# Altium PCB 388D_Control_v1_PCB1_jiin.PcbDoc (part 1 of 3)
Units mil, origin at the board's own origin, x right, y up, seen from the top; angles counter-clockwise.
Board outline 4500 x 3200 mil, 6 copper layers (Top Layer, Singal Layer 2, Signal layer 3, Signal Layer 4, Signal Layer 5, Bottom Layer), stack 32.7 mil thick; 386 components, 377 nets, 1672 pads, 15 vias.
Unrouted connection lines stored in the file: 1151.
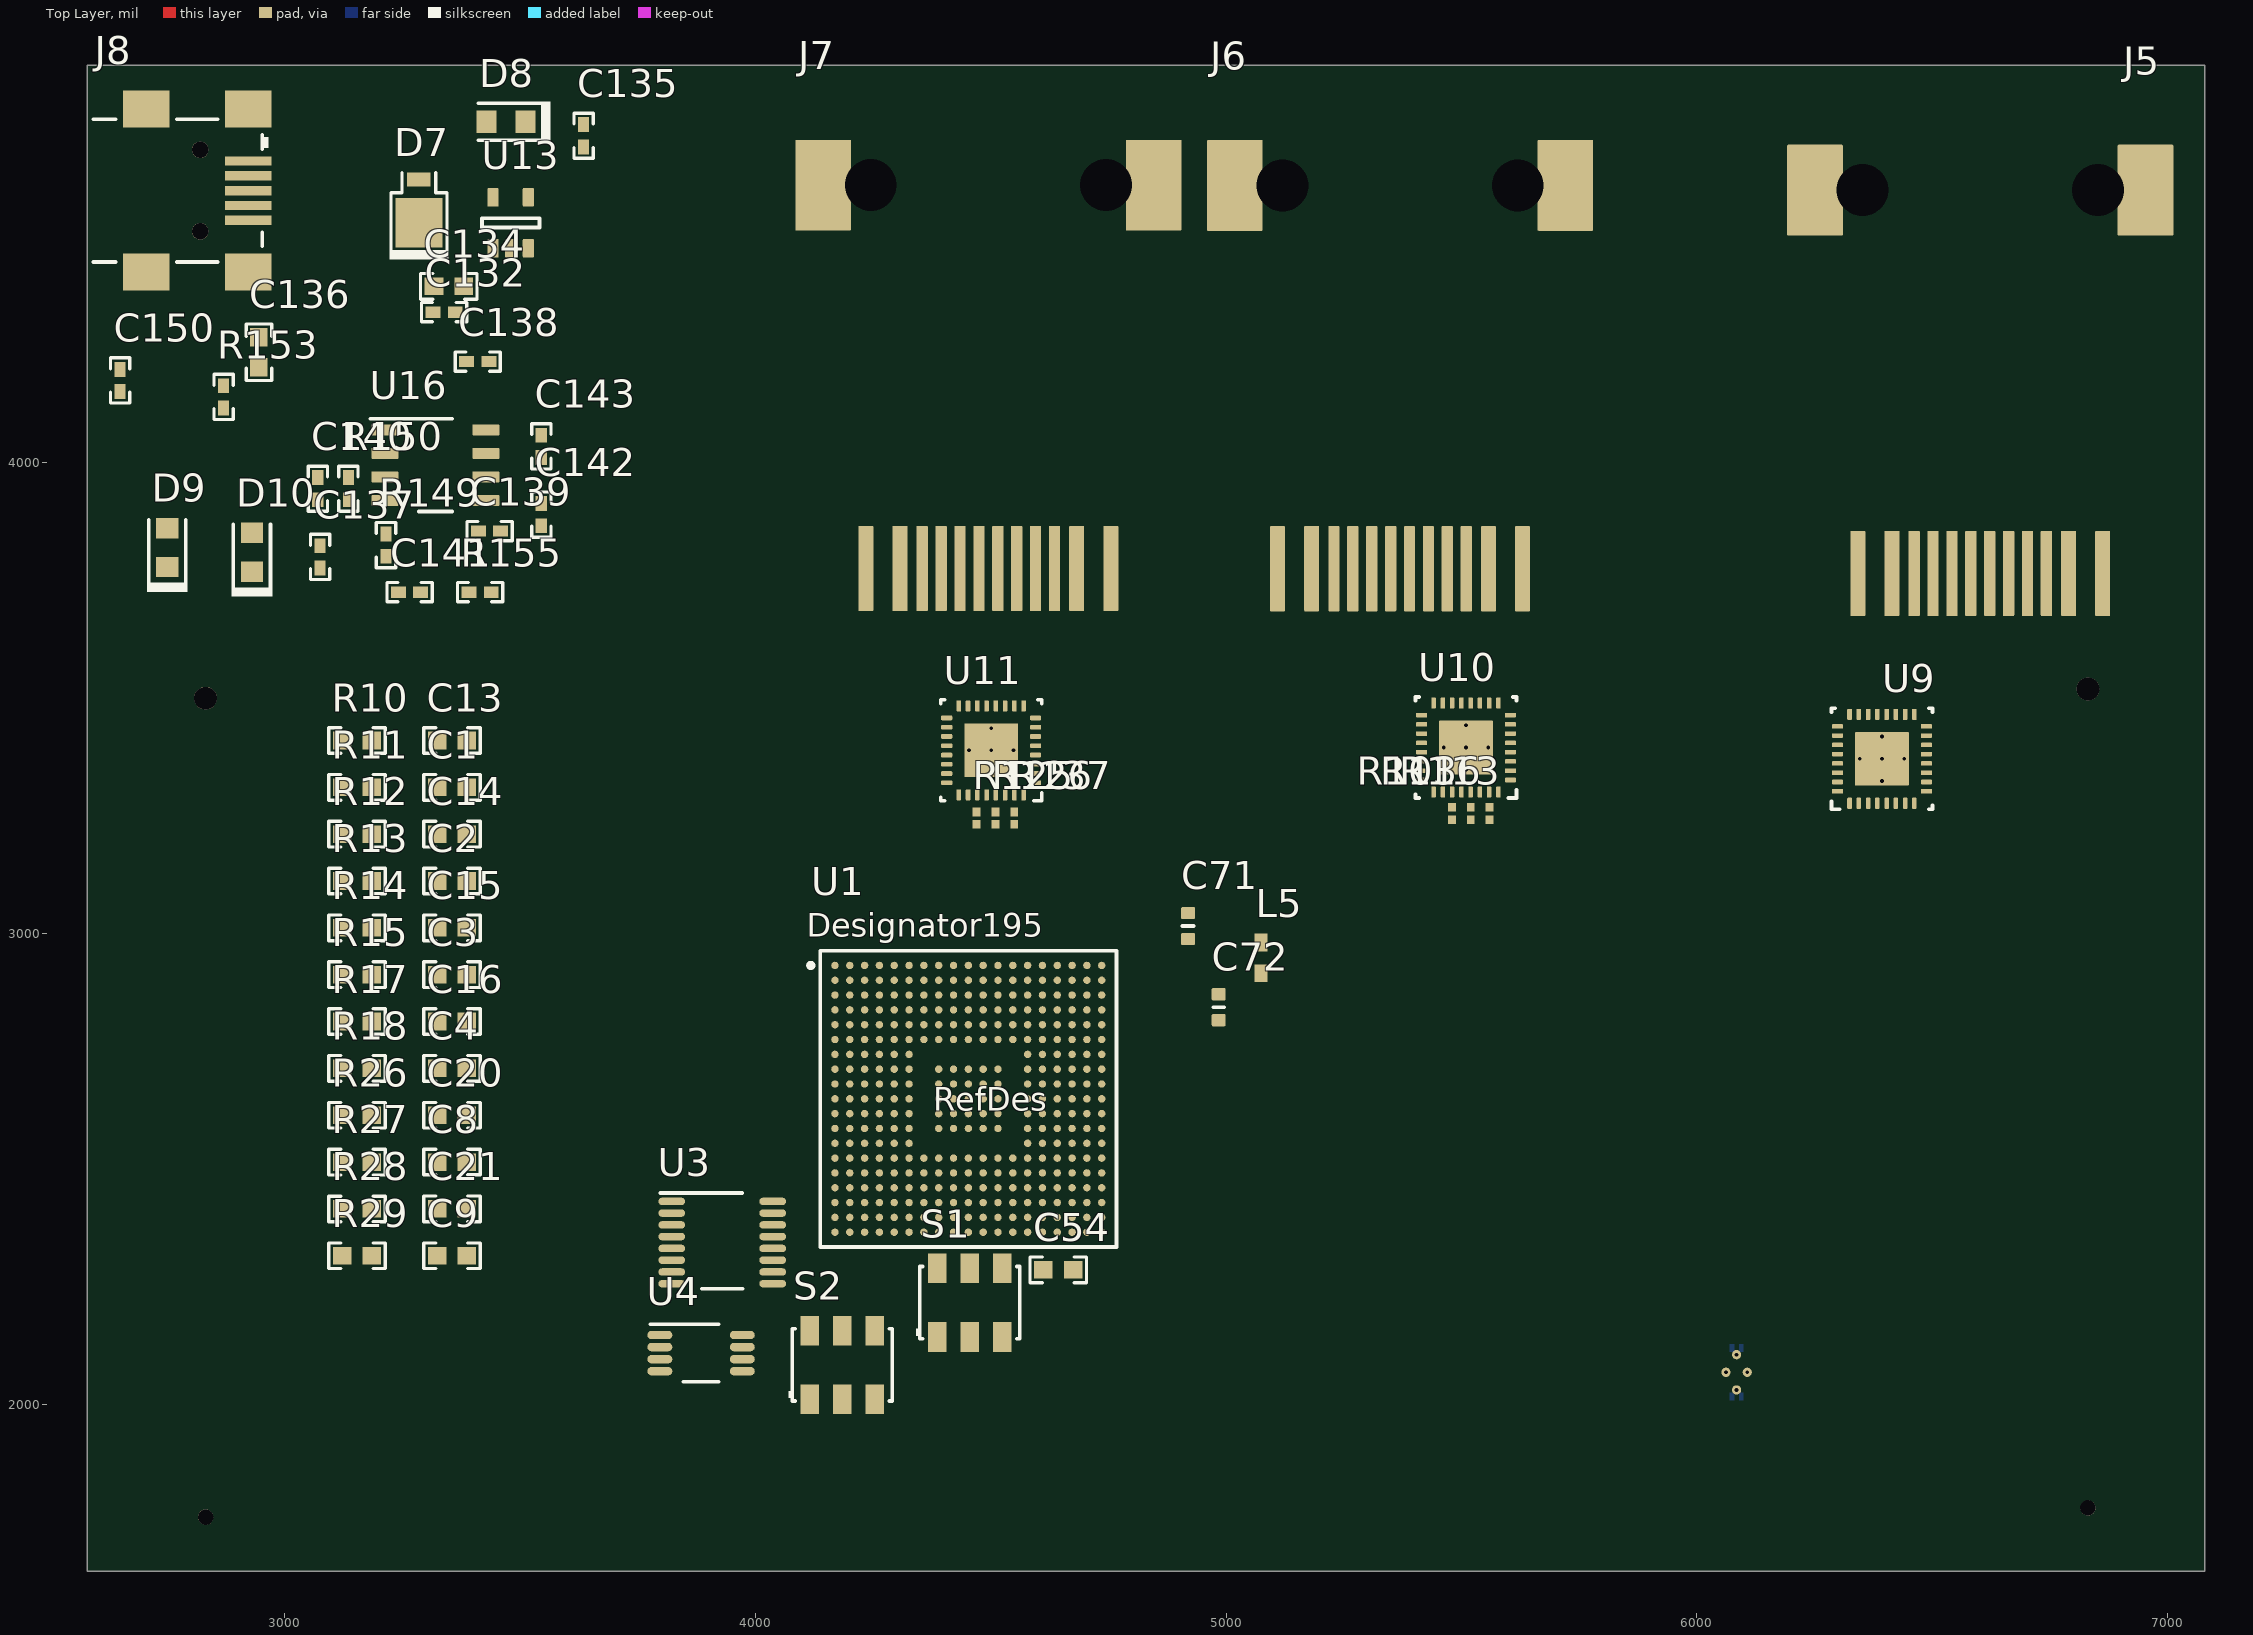
[diagram p0: Top Layer view]
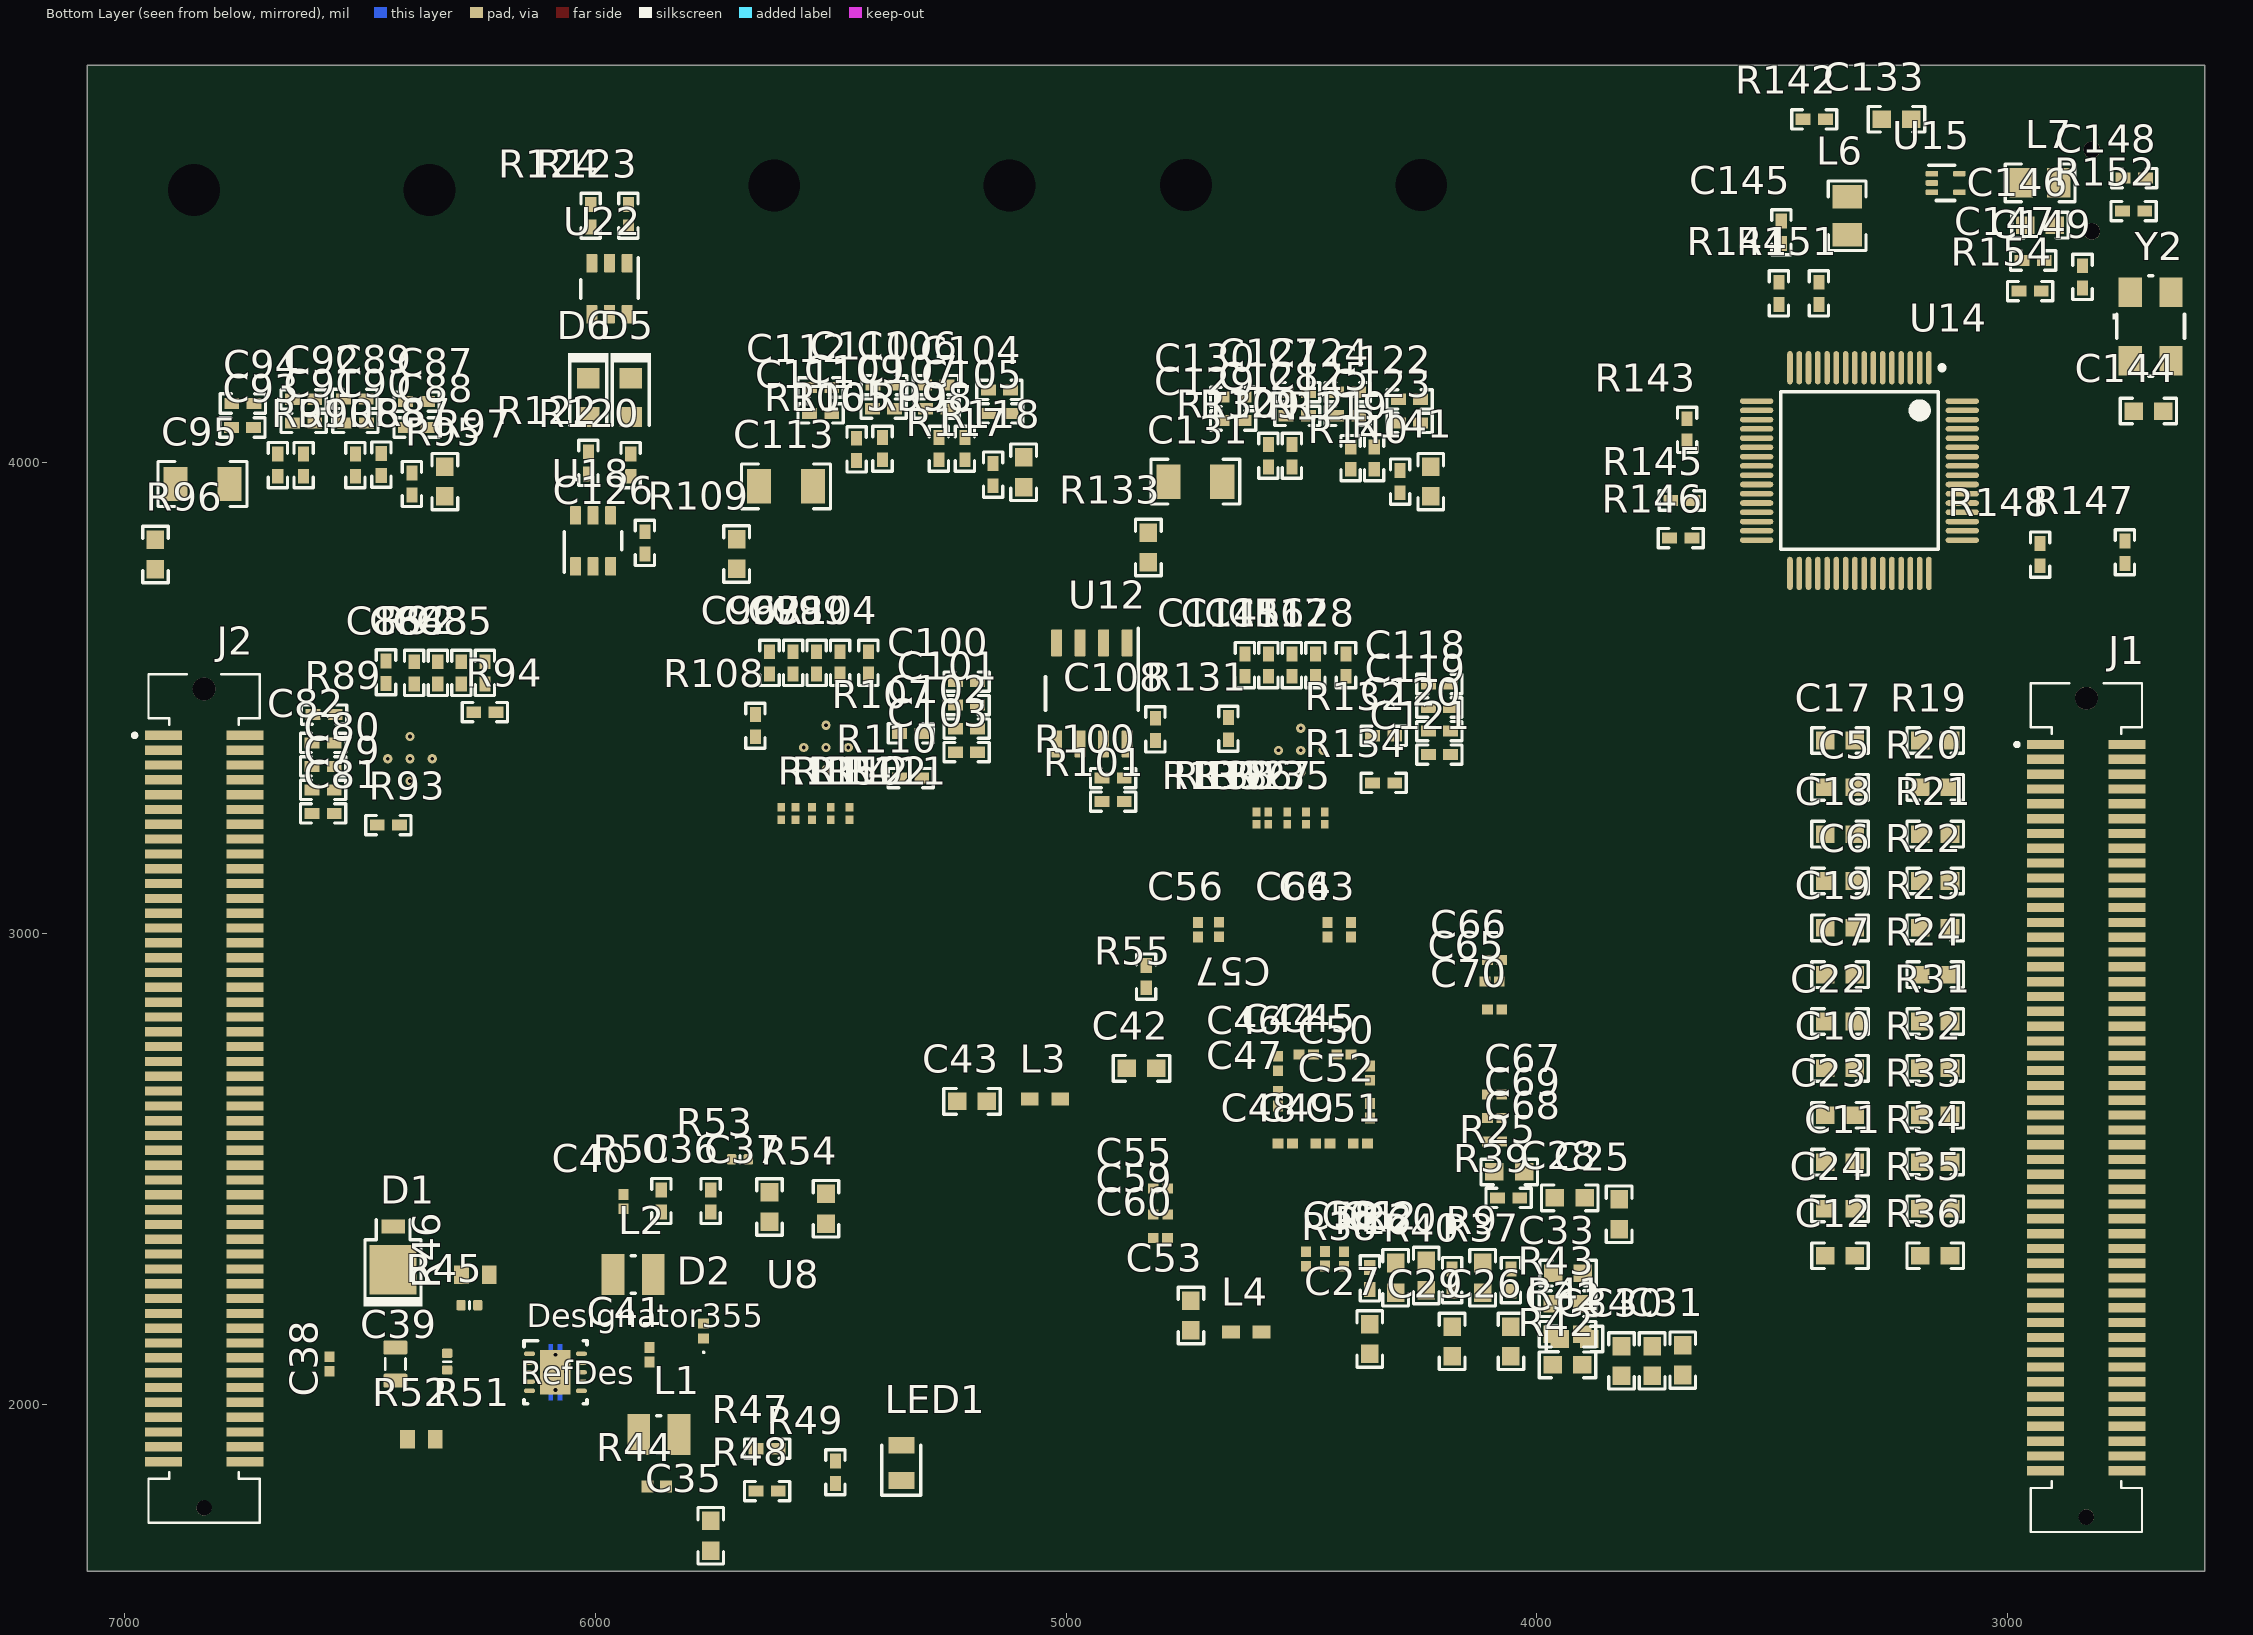
[diagram p1: Bottom Layer view, seen from below]

## Layer stack, top to bottom
Top Solder: solder mask 0.8, Solder Resist, Dk 3.5
Top Layer: signal copper 1.45
Dielectric 1: prepreg 5, FR-4, Dk 4.1
Singal Layer 2: signal copper 1.2
Dielectric 2: core 5, FR-4, Dk 4.1
Signal layer 3: signal copper 1.2
Dielectric 3: prepreg 5, FR-4, Dk 4.8
Signal Layer 4: signal copper 1.2
Dielectric 4: core 5, FR-4, Dk 4.1
Signal Layer 5: signal copper 1.2
Dielectric 5: prepreg 5, FR-4, Dk 4.1
Bottom Layer: signal copper 1.45
Bottom Solder: solder mask 0.8, Solder Resist, Dk 3.5

## Board outline
2580,4845 2580,1645 7080,1645 7080,4845

## Design rules (kind name [scope] priority, off if disabled: settings)
Clearance [All] p1: gap=3.94 ignorepadtopadclearanceinfootprint=FALSE
DiffPairsRouting [All] p1: maxlimit=10 minlimit=10 mostfreqgap=10 toplayer_minwidth=15 toplayer_maxwidth=15 toplayer_prefwidth=15 midlayer1_minwidth=15 midlayer1_maxwidth=15 midlayer1_prefwidth=15 midlayer2_minwidth=15 midlayer2_maxwidth=15 midlayer2_prefwidth=15 midlayer3_minwidth=15 midlayer3_maxwidth=15 midlayer3_prefwidth=15 midlayer4_minwidth=15 midlayer4_maxwidth=15 midlayer4_prefwidth=15 bottomlayer_minwidth=15 bottomlayer_maxwidth=15 bottomlayer_prefwidth=15 maxuncoupledlength=500
PolygonConnect [All] p1: connectstyle=Relief reliefconductorwidth=10 reliefentries=4 polygonreliefangle="90 Angle" airgapwidth=10
RoutingVias [All] p1: holewidth=28 width=50 viastyle="Through Hole" minholewidth=28 minwidth=50 maxholewidth=28 maxwidth=50
SolderMaskExpansion [All] p1: expansion=4 istentingtop=FALSE
SupplyNets "Schematic Supply Nets_13" [InNet('EMU_GND')] p1: voltage=0.000
SupplyNets "Schematic Supply Nets_12" [InNet('EMU_5V0')] p2: voltage=0.000
SupplyNets "Schematic Supply Nets_11" [InNet('MCU_GPIO4')] p3: voltage=0.000
SupplyNets "Schematic Supply Nets_10" [InNet('EMU_3V3')] p4: voltage=0.000
SupplyNets "Schematic Supply Nets_9" [InNet('EMU_USB_5V0')] p5: voltage=0.000
SupplyNets "Schematic Supply Nets_8" [InNet('EMU_1V8')] p6: voltage=0.000
SupplyNets "Schematic Supply Nets_7" [InNet('3V3')] p7: voltage=0.000
SupplyNets "Schematic Supply Nets_5" [InNet('IN_5V0')] p8: voltage=0.000
SupplyNets "Schematic Supply Nets_4" [InNet('VDDA_3V3')] p9: voltage=0.000
SupplyNets "Schematic Supply Nets_3" [InNet('VDD_3V3')] p10: voltage=0.000
SupplyNets "Schematic Supply Nets_1" [InNet('1V2')] p11: voltage=0.000
SupplyNets "Schematic Supply Nets" [InNet('VDD_1V2')] p12: voltage=0.000
Width [All] p1: maxlimit=10 minlimit=10 preferedwidth=10
29 further rules are at their usual default settings.

## Classes and differential pairs
component class 8.Emulator_Interface: C151 C152 C153 C154 C155 C156 C157 C158 C159 C160 J9 J10 R156 S5 U17 U19 U20 U21 U218
component class 7.Emulator: C132 C133 C134 C135 C136 C137 C138 C139 C140 C141 C142 C143 C144 C145 C146 C147 C148 C149 C150 D7 D8 D9 D10 J8 L6 L7 R142 R143 R144 R145 R146 R147 R148 R149 R150 R151 R152 R153 R154 R155 TP11 TP12 TP13 U13 U14 U15 U16 Y2
component class 6.ETCAT: C96 C97 C98 C99 C100 C101 C102 C103 C104 C105 C106 C107 C108 C109 C110 C111 C112 C113 C114 C115 C116 C117 C118 C119 C120 C121 C122 C123 C124 C125 C126 C127 C128 C129 C130 C131 D5 D6 J6 J7 R98 R99 R100 R101 R102 R103 R104 R105 R106 R107 R108 R109 R110 R111 R112 R113 R114 R115 R116 R117 R118 R119 R120 R121 R122 R123 R124 R125 R126 R127 R128 R129 R130 R131 R132 R133 R134 R135 R136 R137 R138 R139 R140 R141 U10 U11 U12 U18 U22
component class 5.ETH: C79 C80 C81 C82 C83 C84 C85 C86 C87 C88 C89 C90 C91 C92 C93 C94 C95 J5 R87 R88 R89 R90 R91 R92 R93 R94 R95 R96 R97 U9
component class 3.ADC: C1 C2 C3 C4 C5 C6 C7 C8 C9 C10 C11 C12 C13 C14 C15 C16 C17 C18 C19 C20 C21 C22 C23 C24 C25 C26 C27 C28 C29 C30 C31 C32 C33 C34 R9 R10 R11 R12 R13 R14 R15 R16 R17 R18 R19 R20 R21 R22 R23 R24 R25 R26 R27 R28 R29 R30 R31 R32 R33 R34 R35 R36 R37 R38 R39 R40 R41 R42 R43 S1 S2 U1 U3 U4
component class 2.Support: C73 C74 C75 C76 C77 C78 D3 D4 J3 R56 R57 R58 R59 R60 R61 R62 R63 R64 R65 R66 R67 R68 R69 R70 R71 R72 R73 R74 R75 R76 R77 R78 R79 R80 R81 R82 R83 R84 R85 R86 S3 S4 TP5 TP6 TP7 TP8 TP9 TP10 U2 U5 U6 U7 Y1
component class 1.GPIO: J1 J2 R1 R2 R3 R4 R5 R6 R7 R8
component class 4.Power: C35 C36 C37 C38 C39 C40 C41 C42 C43 C44 C45 C46 C47 C48 C49 C50 C51 C52 C53 C54 C55 C56 C57 C58 C59 C60 C61 C62 C63 C64 C65 C66 C67 C68 C69 C70 C71 C72 D1 D2 L1 L2 L3 L4 L5 LED1 R44 R45 R46 R47 R48 R49 R50 R51 R52 R53 R54 R55 TP1 TP2 TP3 TP4 U8
differential pair TD: +TD_P -TD_N
differential pair RD: +RD_P -RD_N
differential pair P1_TD: +P1_TD_P -P1_TD_N
differential pair P1_RD: +P1_RD_P -P1_RD_N
differential pair P0_TD: +P0_TD_P -P0_TD_N
differential pair P0_RD: +P0_RD_P -P0_RD_N
differential pair D4D5: +D4D5_P -D4D5_N
differential pair D2D3: +D2D3_P -D2D3_N
differential pair D0D1: +D0D1_P -D0D1_N
differential pair C4C5: +C4C5_P -C4C5_N
differential pair C2C3: +C2C3_P -C2C3_N
differential pair B4B5: +B4B5_P -B4B5_N
differential pair B2B3: +B2B3_P -B2B3_N
differential pair B0B1: +B0B1_P -B0B1_N
differential pair ADC_IN1415: +ADC_IN1415_P -ADC_IN1415_N
differential pair ADC_D4D5: +ADC_D4D5_P -ADC_D4D5_N
differential pair ADC_D2D3: +ADC_D2D3_P -ADC_D2D3_N
differential pair ADC_D0D1: +ADC_D0D1_P -ADC_D0D1_N
differential pair ADC_C4C5: +ADC_C4C5_P -ADC_C4C5_N
differential pair ADC_C2C3: +ADC_C2C3_P -ADC_C2C3_N
differential pair ADC_B4B5: +ADC_B4B5_P -ADC_B4B5_N
differential pair ADC_B2B3: +ADC_B2B3_P -ADC_B2B3_N
differential pair ADC_B0B1: +ADC_B0B1_P -ADC_B0B1_N
differential pair ADC_A4A5: +ADC_A4A5_P -ADC_A4A5_N
differential pair ADC_A2A3: +ADC_A2A3_P -ADC_A2A3_N
differential pair ADC_A0A1: +ADC_A0A1_P -ADC_A0A1_N
differential pair A4A5: +A4A5_P -A4A5_N
differential pair A2A3: +A2A3_P -A2A3_N
differential pair A0A1: +A0A1_P -A0A1_N
differential pair 1415: +1415_P -1415_N

## Components (designator, comment, footprint, x,y, rotation, side; value= is the part's Value field where it differs from the comment)
C1 "C0603C331J5GACTU" 0603 3355,3310.45 r0 top value=330pF
C2 "C0603C331J5GACTU" 0603 3355,3111.36 r0 top value=330pF
C3 "C0603C331J5GACTU" 0603 3355,2912.27 r0 top value=330pF
C4 "C0603C331J5GACTU" 0603 3355,2713.18 r0 top value=330pF
C5 "C0603C331J5GACTU" 0603 3355,3310.45 r0 bottom value=330pF
C6 "C0603C331J5GACTU" 0603 3355,3111.36 r0 bottom value=330pF
C7 "C0603C331J5GACTU" 0603 3355,2912.27 r0 bottom value=330pF
C8 "C0603C331J5GACTU" 0603 3355,2514.09 r0 top value=330pF
C9 "C0603C331J5GACTU" 0603 3355,2315 r0 top value=330pF
C10 "C0603C331J5GACTU" 0603 3355,2713.18 r0 bottom value=330pF
C11 "C0603C331J5GACTU" 0603 3355,2514.09 r0 bottom value=330pF
C12 "C0603C331J5GACTU" 0603 3355,2315 r0 bottom value=330pF
C13 "C0603C331J5GACTU" 0603 3355,3410 r0 top value=330pF
C14 "C0603C331J5GACTU" 0603 3355,3210.91 r0 top value=330pF
C15 "C0603C331J5GACTU" 0603 3355,3011.82 r0 top value=330pF
C16 "C0603C331J5GACTU" 0603 3355,2812.73 r0 top value=330pF
C17 "C0603C331J5GACTU" 0603 3355,3410 r0 bottom value=330pF
C18 "C0603C331J5GACTU" 0603 3355,3210.91 r0 bottom value=330pF
C19 "C0603C331J5GACTU" 0603 3355,3011.82 r0 bottom value=330pF
C20 "C0603C331J5GACTU" 0603 3355,2613.64 r0 top value=330pF
C21 "C0603C331J5GACTU" 0603 3355,2414.55 r0 top value=330pF
C22 "C0603C331J5GACTU" 0603 3355,2812.73 r0 bottom value=330pF
C23 "C0603C331J5GACTU" 0603 3355,2613.64 r0 bottom value=330pF
C24 "C0603C331J5GACTU" 0603 3355,2414.55 r0 bottom value=330pF
C25 "C0603C104K8RACTU" 0603 3824.49,2403.15 r270 bottom value=0.1uF
C26 "GRM188R61A226ME15D" 0603 4054.49,2133.15 r270 bottom value=22uF
C27 "GRM188R61A226ME15D" 0603 4354.49,2138.15 r270 bottom value=22uF
C28 "GRM188R61A226ME15D" 0603 3929.49,2438.15 r180 bottom value=22uF
C29 "GRM188R61A226ME15D" 0603 4179.49,2133.15 r270 bottom value=22uF
C30 "C0603C104K8RACTU" 0603 3754.49,2091.65 r270 bottom value=0.1uF
C31 "C0603C225K9PACTU" 0603 3689.49,2093.15 r270 bottom value=2.2uF
C32 "C0603C105Z9VACTU" 0603 3919.49,2138.15 r180 bottom value=1uF
C33 "C0603C105Z9VACTU" 0603 3932.99,2278.15 r180 bottom value=1uF
C34 "C0603C105Z9VACTU" 0603 3819.49,2091.65 r90 bottom value=1uF
C35 "GRM188R61A226ME15D" 0603 5755,1720 r270 bottom value=22uF
C36 "885012005043" 0402 5755,2431.38 r90 bottom value=33pF
C37 "GRM188R61A226ME15D" 0603 5630,2418.5 r90 bottom value=22uF
C38 "Capacitor 0.1 uF +/- 5% 16 V 0402" CAPC1005X56X25LL10T15 6565,2085 r90 bottom value=0.1uF/C0402
C39 "Capacitor 22µF +/-40% 16V 0805" CAPC0805(2012)145_L 6425,2084.96 r90 bottom value=22μF/C0805
C40 "Capacitor 0.1 uF +/- 5% 16 V 0402" CAPC1005X56X25LL10T15 5940,2430 r270 bottom value=0.1uF/C0402
C41 "Capacitor 0.1 uF +/- 5% 16 V 0402" CAPC1005X56X25LL10T15 5885,2104.65 r270 bottom value=0.1uF/C0402
C42 "C0603C225K8PACTU" 0603 4839.49,2713.15 r0 bottom value=2.2uF
C43 "C0603C225K8PACTU" 0603 5199.49,2643.15 r0 bottom value=2.2uF
C44 "Capacitor 0.1 uF +/- 5% 16 V 0402" CAPC1005X56X25LL10T15 4489.49,2743.15 r180 bottom value=0.1uF/C0402
C45 "Capacitor 0.1 uF +/- 5% 16 V 0402" CAPC1005X56X25LL10T15 4409.49,2743.15 r0 bottom value=0.1uF/C0402
C46 "Capacitor 0.1 uF +/- 5% 16 V 0402" CAPC1005X56X25LL10T15 4549.49,2723.5 r90 bottom value=0.1uF/C0402
C47 "Capacitor 0.1 uF +/- 5% 16 V 0402" CAPC1005X56X25LL10T15 4549.49,2648.5 r90 bottom value=0.1uF/C0402
C48 "Capacitor 0.1 uF +/- 5% 16 V 0402" CAPC1005X56X25LL10T15 4534.13,2553.15 r0 bottom value=0.1uF/C0402
C49 "Capacitor 0.1 uF +/- 5% 16 V 0402" CAPC1005X56X25LL10T15 4454.13,2553.15 r180 bottom value=0.1uF/C0402
C50 "Capacitor 0.1 uF +/- 5% 16 V 0402" CAPC1005X56X25LL10T15 4354.49,2703.15 r270 bottom value=0.1uF/C0402
C51 "Capacitor 0.1 uF +/- 5% 16 V 0402" CAPC1005X56X25LL10T15 4374.49,2553.15 r180 bottom value=0.1uF/C0402
C52 "Capacitor 0.1 uF +/- 5% 16 V 0402" CAPC1005X56X25LL10T15 4354.49,2623.15 r270 bottom value=0.1uF/C0402
C53 "C0603C225K8PACTU" 0603 4734.49,2188.15 r90 bottom value=2.2uF
C54 "C0603C225K8PACTU" 0603 4643.5,2285 r180 top value=2.2uF
C55 "Capacitor 0.1 uF +/- 5% 16 V 0402" CAPC1005X56X25LL10T15 4799.13,2458.15 r180 bottom value=0.1uF/C0402
C56 "Capacitor 0.1 uF +/- 5% 16 V 0402" CAPC1005X56X25LL10T15 4674.49,3008.15 r270 bottom value=0.1uF/C0402
C57 "Capacitor 0.1 uF +/- 5% 16 V 0402" CAPC1005X56X25LL10T15 4719.49,3007.8 r270 bottom value=0.1uF/C0402
C58 "Capacitor 0.1 uF +/- 5% 16 V 0402" CAPC1005X56X25LL10T15 4489.49,2308.15 r90 bottom value=0.1uF/C0402
C59 "Capacitor 0.1 uF +/- 5% 16 V 0402" CAPC1005X56X25LL10T15 4799.13,2403.15 r180 bottom value=0.1uF/C0402
C60 "Capacitor 0.1 uF +/- 5% 16 V 0402" CAPC1005X56X25LL10T15 4799.49,2353.15 r180 bottom value=0.1uF/C0402
C61 "Capacitor 0.1 uF +/- 5% 16 V 0402" CAPC1005X56X25LL10T15 4449.49,2308.5 r90 bottom value=0.1uF/C0402
C62 "Capacitor 0.1 uF +/- 5% 16 V 0402" CAPC1005X56X25LL10T15 4409.49,2308.15 r90 bottom value=0.1uF/C0402
C63 "Capacitor 0.1 uF +/- 5% 16 V 0402" CAPC1005X56X25LL10T15 4394.49,3007.8 r270 bottom value=0.1uF/C0402
C64 "Capacitor 0.1 uF +/- 5% 16 V 0402" CAPC1005X56X25LL10T15 4444.49,3007.8 r270 bottom value=0.1uF/C0402
C65 "Capacitor 0.1 uF +/- 5% 16 V 0402" CAPC1005X56X25LL10T15 4094.49,2898.15 r0 bottom value=0.1uF/C0402
C66 "Capacitor 0.1 uF +/- 5% 16 V 0402" CAPC1005X56X25LL10T15 4089.13,2943.15 r0 bottom value=0.1uF/C0402
C67 "Capacitor 0.1 uF +/- 5% 16 V 0402" CAPC1005X56X25LL10T15 4089.13,2658.15 r0 bottom value=0.1uF/C0402
C68 "Capacitor 0.1 uF +/- 5% 16 V 0402" CAPC1005X56X25LL10T15 4089.13,2558.15 r0 bottom value=0.1uF/C0402
C69 "Capacitor 0.1 uF +/- 5% 16 V 0402" CAPC1005X56X25LL10T15 4089.13,2608.15 r0 bottom value=0.1uF/C0402
C70 "Capacitor 0.1 uF +/- 5% 16 V 0402" CAPC1005X56X25LL10T15 4089.13,2838.15 r0 bottom value=0.1uF/C0402
C71 "Capacitor 10µF +/-20% 10V 0603" CAPC0603(1608)100_L 4919.49,3015.59 r90 top value=10μF
C72 "Capacitor 10µF +/-20% 10V 0603" CAPC0603(1608)100_L 4984.49,2843.15 r90 top value=10μF
C73 "CL05B104KP5NNNC" 0402 15610,3060 r90 top value=0.1uF
C74 "C0402C103J5RACTU" 0402 14020,3060 r90 top value=0.01uF
C75 "CL05B104KP5NNNC" 0402 13575,3060 r90 top value=0.1uF
C76 "C0402C103J5RACTU" 0402 12455,3060 r90 top value=0.01uF
C77 "CL05B104KP5NNNC" 0402 11995,3060 r90 top value=0.1uF
C78 "CL05B104KP5NNNC" 0402 10210,3060 r90 top value=0.1uF
C79 "CL05A106MQ5NUNC" 0402 6578.62,3305 r0 bottom value=10uF
C80 "EMK105BJ105KVHF" 0402 6578.62,3355 r0 bottom value=1uF
C81 "LMK105BJ104KV-F" 0402 6578.62,3255 r0 bottom value=0.1uF
C82 "885012205031" 0402 6578.62,3405 r0 bottom value=0.01uF
C83 "885012205031" 0402 6285,3553.62 r90 bottom value=0.01uF
C84 "LMK105BJ104KV-F" 0402 6335,3553.62 r90 bottom value=0.1uF
C85 "EMK105BJ105KVHF" 0402 6235,3553.62 r90 bottom value=1uF
C86 "CL05A106MQ5NUNC" 0402 6385,3553.62 r90 bottom value=10uF
C87 "LMK105BJ104KV-F" 0402 6380,4130 r180 bottom value=0.1uF
C88 "EMK105BJ105KVHF" 0402 6380,4075 r180 bottom value=1uF
C89 "EMK105BJ105KVHF" 0402 6511.38,4136 r0 bottom value=1uF
C90 "LMK105BJ104KV-F" 0402 6510,4085 r0 bottom value=0.1uF
C91 "EMK105BJ105KVHF" 0402 6620,4085 r180 bottom value=1uF
C92 "LMK105BJ104KV-F" 0402 6620,4135 r180 bottom value=0.1uF
C93 "LMK105BJ104KV-F" 0402 6750,4075 r0 bottom value=0.1uF
C94 "EMK105BJ105KVHF" 0402 6749.12,4126 r0 bottom value=1uF
C95 "12061C472KAT2A" 1206 6835,3955 r180 bottom value=4700pF
C96 "CL05A106MQ5NUNC" 0402 5630,3575 r90 bottom value=10uF
C97 "EMK105BJ105KVHF" 0402 5580,3575 r90 bottom value=1uF
C98 "LMK105BJ104KV-F" 0402 5530,3575 r90 bottom value=0.1uF
C99 "885012205031" 0402 5480,3575 r90 bottom value=0.01uF
C100 "885012205031" 0402 5211.38,3535 r180 bottom value=0.01uF
C101 "LMK105BJ104KV-F" 0402 5211.38,3485 r180 bottom value=0.1uF
C102 "EMK105BJ105KVHF" 0402 5211.38,3435 r180 bottom value=1uF
C103 "CL05A106MQ5NUNC" 0402 5211.38,3385 r180 bottom value=10uF
C104 "LMK105BJ104KV-F" 0402 5141.38,4155 r180 bottom value=0.1uF
C105 "EMK105BJ105KVHF" 0402 5140,4105 r180 bottom value=1uF
C106 "EMK105BJ105KVHF" 0402 5276.38,4165 r0 bottom value=1uF
C107 "LMK105BJ104KV-F" 0402 5275,4115 r0 bottom value=0.1uF
C108 "CL05B104KP5NNNC" 0402 4810,3433.62 r90 bottom value=0.1uF
C109 "EMK105BJ105KVHF" 0402 5387.76,4115 r180 bottom value=1uF
C110 "LMK105BJ104KV-F" 0402 5386.38,4165 r180 bottom value=0.1uF
C111 "LMK105BJ104KV-F" 0402 5521.38,4105 r0 bottom value=0.1uF
C112 "EMK105BJ105KVHF" 0402 5521.38,4160 r0 bottom value=1uF
C113 "12061C472KAT2A" 1206 5595,3950 r180 bottom value=4700pF
C114 "CL05A106MQ5NUNC" 0402 4620,3570 r90 bottom value=10uF
C115 "EMK105BJ105KVHF" 0402 4570,3570 r90 bottom value=1uF
C116 "LMK105BJ104KV-F" 0402 4520,3570 r90 bottom value=0.1uF
C117 "885012205031" 0402 4470,3570 r90 bottom value=0.01uF
C118 "885012205031" 0402 4206.38,3530 r180 bottom value=0.01uF
C119 "LMK105BJ104KV-F" 0402 4206.38,3480 r180 bottom value=0.1uF
C120 "EMK105BJ105KVHF" 0402 4206.38,3430 r180 bottom value=1uF
C121 "CL05A106MQ5NUNC" 0402 4206.38,3380 r180 bottom value=10uF
C122 "LMK105BJ104KV-F" 0402 4270,4135 r180 bottom value=0.1uF
C123 "EMK105BJ105KVHF" 0402 4270,4085 r180 bottom value=1uF
C124 "EMK105BJ105KVHF" 0402 4401.38,4150 r0 bottom value=1uF
C125 "LMK105BJ104KV-F" 0402 4401.38,4100 r0 bottom value=0.1uF
C126 "CL05B104KP5NNNC" 0402 5895,3830 r270 bottom value=0.1uF
C127 "EMK105BJ105KVHF" 0402 4508.62,4150 r180 bottom value=1uF
C128 "LMK105BJ104KV-F" 0402 4508.62,4100 r180 bottom value=0.1uF
C129 "LMK105BJ104KV-F" 0402 4645,4090 r0 bottom value=0.1uF
C130 "EMK105BJ105KVHF" 0402 4645,4140 r0 bottom value=1uF
C131 "12061C472KAT2A" 1206 4725,3960 r180 bottom value=4700pF
C132 "CL05B104KP5NNNC" 0402 3338.62,4320 r0 top value=0.1uF
C133 "C0603C475K9PACTU" 0603 3235,4730 r180 bottom value=4.7uF
C134 "C0603C475K9PACTU" 0603 3348.5,4375 r180 top value=4.7uF
C135 "0402ZC103KAT2A" 0402 3635,4695 r270 top value=0.01uF
C136 "C0603C475K9PACTU" 0603 2945,4235 r90 top value=4.7uF
C137 "CL05B104KP5NNNC" 0402 3075,3800 r90 top value=0.1uF
C138 "CL05B104KP5NNNC" 0402 3410,4215 r180 top value=0.1uF
C139 "CL05B104KP5NNNC" 0402 3435,3855 r180 top value=0.1uF
C140 "CL05B104KP5NNNC" 0402 3070,3945 r90 top value=0.1uF
C141 "CL05B104KP5NNNC" 0402 3265,3725 r0 top value=0.1uF
C142 "CL05B104KP5NNNC" 0402 3545,3890 r270 top value=0.1uF
C143 "CL05B104KP5NNNC" 0402 3545,4035 r90 top value=0.1uF
C144 "C0603C475K9PACTU" 0603 2700,4110 r0 bottom value=4.7uF
C145 "CL05B104KP5NNNC" 0402 3480,4490 r90 bottom value=0.1uF
C146 "C0603C475K9PACTU" 0603 2930,4505 r180 bottom value=4.7uF
C147 "CL05B104KP5NNNC" 0402 2945,4430 r0 bottom value=0.1uF
C148 "CGA2B2X7R1H332K050BA" 0402 2730,4605 r180 bottom value=3300pF
C149 "C0402C270J5GACTU" 0402 2840,4395 r270 bottom value=27pF
C150 "C0402C270J5GACTU" 0402 2650,4175 r90 top value=27pF
C151 "CL05B104KP5NNNC" 0402 12260,8585 r90 top value=0.1uF
C152 "CL05B104KP5NNNC" 0402 12520,8585 r90 top value=0.1uF
C153 "CL05B104KP5NNNC" 0402 11770,8585 r90 top value=0.1uF
C154 "CL05B104KP5NNNC" 0402 10225,8585 r90 top value=0.1uF
C155 "CL05B104KP5NNNC" 0402 10505,8585 r90 top value=0.1uF
C156 "CL05B104KP5NNNC" 0402 9320,8585 r90 top value=0.1uF
C157 "CL05B104KP5NNNC" 0402 9600,8585 r90 top value=0.1uF
C158 "CL05B104KP5NNNC" 0402 8415,8585 r90 top value=0.1uF
C159 "CL05B104KP5NNNC" 0402 8695,8585 r90 top value=0.1uF
C160 "C1812C100JHGACTU" 1812_180 7760,8665 r0 top value=10pF
D1 "CMP-004-00076-1" POWERMITE 6430,2331 r90 bottom value=10V
D2 "CFSH05-20L_TR" CFSH0520LTRPBFREE 5770,2155 r90 bottom
D3 "150080SS75000" WL-SMCW_RED_0805 14320,3050 r0 top value=Red
D4 "150080SS75000" WL-SMCW_RED_0805 14535,3050 r0 top value=Red
D5 "150080SS75000" WL-SMCW_RED_0805 5925,4138.66 r270 bottom value=Red
D6 "150080VS75000" WL-SMCW_Green_0805 6015,4138.66 r270 bottom value="Bright Green"
D7 "MBRM110ET1G" POWERMITE 3285,4556 r90 top value=10V
D8 "150080VS75000" WL-SMCW_Green_0805 3470,4725 r180 top value="Bright Green"
D9 "150080BS75000" WL-SMCW_Blue_0805 2750,3820 r90 top value=Blue
D10 "150080BS75000" WL-SMCW_Blue_0805 2930,3810 r90 top value=Blue
J1 "10144517-101802LF" AMPHENOL_10144517-101802LF 2831.61,2629.72 r90 bottom
J2 "10144517-101802LF" AMPHENOL_10144517-101802LF 6831.61,2649.21 r90 bottom
J3 "CMP-0086568-1" FP-TMM-105-01-T-D_HDR10-MFG 19105,3210 r90 top
J5 "7498010210A" Wurth_7498010210A 6602.8,4579.57 r90 top
J6 "7498010210A" Wurth_7498010210A 5369.92,4589.57 r90 top
J7 "7498010210A" Wurth_7498010210A 4495,4590 r90 top
J8 "65100516121" Wurth_65100516121 2587.72,4578.39 r270 top
J9 "302-S101" SHDR10W66P254_2X5_2030X905X905P 8210,8740 r90 top
J10 "302-S101" SHDR10W66P254_2X5_2030X905X905P 7425,8740 r90 top
L1 "LQM2HPN2R2MG0L" INDC2520X100X60NL20T20 5865,1935 r180 bottom value=2.2μH
L2 "LQM2HPN2R2MG0L" INDC2520X100X60NL20T20 5920,2275 r180 bottom value=3.3μH
L3 "BLM18AG121SN1D" MURA-BLM18-F-H1-CHIP-2_V 5044.49,2648.15 r180 bottom
L4 "BLM18AG121SN1D" MURA-BLM18-F-H1-CHIP-2_V 4616.97,2153.15 r180 bottom
L5 "BLM18AG121SN1D" MURA-BLM18-F-H1-CHIP-2_V 5074.49,2948.15 r270 top
L6 "HZ0805E601R-10" 0805_HV 3340,4525 r90 bottom value="600 ohm"
L7 "HZ0805E601R-10" 0805_HV 2930,4595 r180 bottom value="600 ohm"
LED1 "150080VS75000" LEDC2012X70N 5350,1875 r90 bottom
R1 "Resistor 4k7 +/-1% 0603 100 mW" RESC1608X55X25ML10T15 9470,2395 r0 top value=4.7k
R2 "Resistor 4k7 +/-1% 0603 100 mW" RESC1608X55X25ML10T15 9650,2395 r0 top value=4.7k
R3 "CRCW040239R0JNED" 0402 8600,2375 r0 top value=39
R4 "CRCW040239R0JNED" 0402 8430,2375 r0 top value=39
R5 "CRCW040239R0JNED" 0402 8260,2375 r0 top value=39
R6 "CRCW040239R0JNED" 0402 8090,2375 r0 top value=39
R7 "CRCW040239R0JNED" 0402 7920,2375 r0 top value=39
R8 "CRCW040239R0JNED" 0402 7750,2375 r0 top value=39
R9 "CRCW06030000Z0EA" 0603 4114.49,2268.15 r90 bottom value=0
R10 "CRCW06030000Z0EA" 0603 3153.5,3410 r180 top value=0
R11 "CRCW06030000Z0EA" 0603 3153.5,3310.45 r180 top value=0
R12 "CRCW06030000Z0EA" 0603 3153.5,3210.91 r180 top value=0
R13 "CRCW06030000Z0EA" 0603 3153.5,3111.36 r180 top value=0
R14 "CRCW06030000Z0EA" 0603 3153.5,3011.82 r180 top value=0
R15 "CRCW06030000Z0EA" 0603 3153.5,2912.27 r180 top value=0
R16 "CRCW06030000Z0EA" 0603 4299.49,2268.15 r90 bottom value=0
R17 "CRCW06030000Z0EA" 0603 3153.5,2812.73 r180 top value=0
R18 "CRCW06030000Z0EA" 0603 3153.5,2713.18 r180 top value=0
R19 "CRCW06030000Z0EA" 0603 3152.99,3410 r180 bottom value=0
R20 "CRCW06030000Z0EA" 0603 3152.99,3310.45 r180 bottom value=0
R21 "CRCW06030000Z0EA" 0603 3152.99,3210.91 r180 bottom value=0
R22 "CRCW06030000Z0EA" 0603 3152.99,3111.36 r180 bottom value=0
R23 "CRCW06030000Z0EA" 0603 3152.99,3011.82 r180 bottom value=0
R24 "CRCW06030000Z0EA" 0603 3152.99,2912.27 r180 bottom value=0
R25 "CRCW06030000Z0EA" 0603 4057.99,2493.15 r0 bottom value=0
R26 "CRCW06030000Z0EA" 0603 3153.5,2613.64 r180 top value=0
R27 "CRCW06030000Z0EA" 0603 3153.5,2514.09 r180 top value=0
R28 "CRCW06030000Z0EA" 0603 3153.5,2414.55 r180 top value=0
R29 "CRCW06030000Z0EA" 0603 3153.5,2315 r180 top value=0
R30 "CRCW06030000Z0EA" 0603 4234.49,2273.15 r90 bottom value=0
R31 "CRCW06030000Z0EA" 0603 3152.99,2812.73 r180 bottom value=0
R32 "CRCW06030000Z0EA" 0603 3152.99,2713.18 r180 bottom value=0
R33 "CRCW06030000Z0EA" 0603 3152.99,2613.64 r180 bottom value=0
R34 "CRCW06030000Z0EA" 0603 3152.99,2514.09 r180 bottom value=0
R35 "CRCW06030000Z0EA" 0603 3152.99,2414.55 r180 bottom value=0
R36 "CRCW06030000Z0EA" 0603 3152.99,2315 r180 bottom value=0
R37 "ERJ2BWFR100X" 0402 4054.49,2263.15 r270 bottom value=0.1
R38 "ERJ2BWFR100X" 0402 4354.49,2266.77 r270 bottom value=0.1
R39 "ERJ2BWFR100X" 0402 4059.49,2438.15 r180 bottom value=0.1
R40 "ERJ2BWFR100X" 0402 4179.49,2263.15 r270 bottom value=0.1
R41 "CRCW06030000Z0EA" 0603 3934.49,2148.15 r180 bottom value=0
R42 "CRCW06030000Z0EA" 0603 3934.49,2083.15 r0 bottom value=0
R43 "RC0603FR-071KL" 0603 3934.49,2213.15 r0 bottom value=1.00k
R44 "Resistor 0R +/- 5% 0402 100 mW" RESC1005X40X25ML05T05 5870,1825 r180 bottom value=0
R45 "22KR2F" RESC0402(1005)_L 6267.72,2210 r0 bottom value=22k/R0402
R46 "Resistor 0R +/- 5% 0603 100 mW" RESC1608X55X25ML10T15 6255,2275 r0 bottom value=0
R47 "CRCW0402680RJNED" 0402 5635,1905 r0 bottom value=680
R48 "CRCW0402340KFKED" 0402 5635,1815 r0 bottom value=340k
R49 "ERJ-2RKF2001X" 0402 5490,1855 r270 bottom value=2.00k
R50 "CRCW0402205KFKED" 0402 5860,2431.38 r270 bottom value=205k
R51 "10KR2F" RESC0402(1005)_L 6315,2090 r90 bottom value=10k/R0402
R52 "Resistor 100k +/-1% 0603 100 mW" RESC1608X55X25ML10T15 6370,1925 r180 bottom value=100k/0603
R53 "Resistor 200K +/-1 % 0402 63 mW" RESC0402(1005)_L 5692.72,2520 r0 bottom value=200k
R54 "RT0603DRE0775KL" 0603 5510,2415 r270 bottom value=75.0k
R55 "CRCW040256R0JNED" 0402 4829.49,2908.15 r270 bottom value=56
R56 "CRCW06030000Z0EA" 0603 19270,3070 r90 top value=0
R57 "CRCW06030000Z0EA" 0603 18590,3070 r90 top value=0
R58 "CRCW06030000Z0EA" 0603 18360,3070 r90 top value=0
R59 "CRCW040239R0JNED" 0402 18120,3060 r90 top value=39
R60 "CRCW06030000Z0EA" 0603 17900,3070 r90 top value=0
R61 "CRCW06030000Z0EA" 0603 17720,3040 r0 top value=0
R62 "CRCW04022K20JNED" 0402 16990,3060 r90 top value=2.2k
R63 "CRCW04022K20JNED" 0402 17220,3060 r90 top value=2.2k
R64 "RC0402FR-0710KL" 0402 17450,3060 r90 top value=10.0k
R65 "CRCW06030000Z0EA" 0603 16765,3070 r90 top value=0
R66 "CRCW0402680RJNED" 0402 16300,3060 r90 top value=680
R67 "CRCW0402680RJNED" 0402 16530,3060 r90 top value=680
R68 "CRCW04022K20JNED" 0402 16070,3060 r90 top value=2.2k
R69 "CRCW04021M50JNED" 0402 14930,3060 r90 top value=1.5Meg
R70 "CRCW04021M50JNED" 0402 15160,3060 r90 top value=1.5Meg
R71 "CRCW04022K20JNED" 0402 13145,3060 r90 top value=2.2k
R72 "CRCW06030000Z0EA" 0603 12690,3070 r90 top value=0
R73 "CRCW06030000Z0EA" 0603 11310,3070 r90 top value=0
R74 "CRCW040256K0JNED" 0402 11530,3060 r90 top value=56k
R75 "CRCW040256K0JNED" 0402 11760,3060 r90 top value=56k
R76 "CRCW06030000Z0EA" 0603 10640,3070 r90 top value=0
R77 "CPF0402B10RE1" CPF0402 9980,3050 r90 top value=10.0
R78 "CPF0402B10RE1" CPF0402 9290,3050 r90 top value=10.0
R79 "CRCW04022K20JNED" 0402 9515,3060 r90 top value=2.2k
R80 "CRCW04022K20JNED" 0402 9745,3060 r90 top value=2.2k
R81 "CPF0402B10RE1" CPF0402 8910,3050 r90 top value=10.0
R82 "CRCW04020000Z0EDHP" 0402 8400,3060 r90 top value=0
R83 "CPF0402B10RE1" CPF0402 8170,3050 r90 top value=10.0
R84 "CRCW04020000Z0EDHP" 0402 7935,3060 r90 top value=0
R85 "CRCW06030000Z0EA" 0603 7715,3070 r90 top value=0
R86 "CRCW04020000Z0EDHP" 0402 7475,3060 r90 top value=0
R87 "RC0402FR-0749R9L" 0402 6455,3996.38 r90 bottom value=49.9
R88 "RC0402FR-0749R9L" 0402 6510,3995 r90 bottom value=49.9
R89 "CRCW04024K87FKED" 0402 6576.38,3465 r0 bottom value=4.87k
R90 "RC0402FR-0749R9L" 0402 6620,3995 r90 bottom value=49.9
R91 "RC0402FR-0749R9L" 0402 6675,3995 r90 bottom value=49.9
R92 "CRCW04022K20JNED" 0402 6445,3555 r90 bottom value=2.2k
R93 "RC0402FR-0710KL" 0402 6440,3230 r180 bottom value=10.0k
R94 "CRCW04022K49FKED" 0402 6235,3470 r180 bottom value=2.49k
R95 "CRCW04022K20JNED" 0402 6390,3955 r90 bottom value=2.2k
R96 "CRCW0603470RJNEA" 0603 6935,3805 r270 bottom value=470
R97 "CRCW0603470RJNEA" 0603 6320,3960 r270 bottom value=470
R98 "RC0402FR-0749R9L" 0402 5215,4030 r90 bottom value=49.9
R99 "RC0402FR-0749R9L" 0402 5270,4030 r90 bottom value=49.9
R100 "CRCW04024K70JNED" 0402 4900,3330 r180 bottom value=4.7k
R101 "CRCW04024K70JNED" 0402 4900,3280 r180 bottom value=4.7k
R102 "CRCW02012K20JNED" 0201 5500,3255 r270 bottom value=2.2k
R103 "CRCW02012K20JNED" 0201 5480,3255 r270 top value=2.2k
R104 "CRCW04024K87FKED" 0402 5420,3575 r90 bottom value=4.87k
R105 "RC0402FR-0749R9L" 0402 5390,4030 r90 bottom value=49.9
R106 "RC0402FR-0749R9L" 0402 5445,4028.62 r90 bottom value=49.9
R107 "CRCW04022K20JNED" 0402 5330,3425 r0 bottom value=2.2k
R108 "RC0402FR-0710KL" 0402 5660,3441.38 r270 bottom value=10.0k
R109 "CRCW0603470RJNEA" 0603 5700,3806.5 r270 bottom value=470
R110 "CRCW04022K49FKED" 0402 5330,3330 r0 bottom value=2.49k
R111 "CRCW02012K20JNED" 0201 5460,3255 r90 bottom value=2.2k
R112 "CRCW02012K20JNED" 0201 5540,3255 r90 bottom value=2.2k
R113 "CRCW02012K20JNED" 0201 5560,3255 r90 top value=2.2k
R114 "CRCW02012K20JNED" 0201 5575,3255 r90 bottom value=2.2k
R115 "CRCW02012K20JNED" 0201 5605,3255 r90 bottom value=2.2k
R116 "CRCW02012K20JNED" 0201 5520,3255 r90 top value=2.2k
R117 "CRCW04022K20JNED" 0402 5155,3975 r90 bottom value=2.2k
R118 "CRCW0603470RJNEA" 0603 5090,3980 r270 bottom value=470
R119 "RC0402FR-0749R9L" 0402 4345,4010 r90 bottom value=49.9
R120 "CRCW04021K27FKED" 0402 5925,3995 r270 bottom value=1.27k
R121 "RC0402FR-0749R9L" 0402 4395,4010 r90 bottom value=49.9
R122 "CRCW0402680RJNED" 0402 6015,4000 r90 bottom value=680
R123 "CRCW04021M50JNED" 0402 5930,4525 r90 bottom value=1.5Meg
R124 "CRCW04021M50JNED" 0402 6010,4525 r90 bottom value=1.5Meg
R125 "CRCW02012K20JNED" 0201 4470,3245 r270 top value=2.2k
R126 "CRCW02012K20JNED" 0201 4510,3245 r270 top value=2.2k
R127 "CRCW02012K20JNED" 0201 4490,3245 r270 bottom value=2.2k
R128 "CRCW04024K87FKED" 0402 4405,3570 r90 bottom value=4.87k
R129 "RC0402FR-0749R9L" 0402 4520,4015 r90 bottom value=49.9
R130 "RC0402FR-0749R9L" 0402 4570,4015 r90 bottom value=49.9
R131 "RC0402FR-0710KL" 0402 4655,3435 r270 bottom value=10.0k
R132 "CRCW04022K20JNED" 0402 4325,3420 r0 bottom value=2.2k
R133 "CRCW0603470RJNEA" 0603 4825,3820 r270 bottom value=470
R134 "CRCW04022K49FKED" 0402 4325,3320 r0 bottom value=2.49k
R135 "CRCW02012K20JNED" 0201 4450,3245 r90 bottom value=2.2k
R136 "CRCW02012K20JNED" 0201 4530,3245 r90 bottom value=2.2k
R137 "CRCW02012K20JNED" 0201 4550,3245 r90 top value=2.2k
R138 "CRCW02012K20JNED" 0201 4570,3245 r90 bottom value=2.2k
R139 "CRCW02012K20JNED" 0201 4595,3245 r90 bottom value=2.2k
R140 "CRCW04022K20JNED" 0402 4290,3960 r90 bottom value=2.2k
R141 "CRCW0603470RJNEA" 0603 4225,3960 r270 bottom value=470
R142 "CRCW0402680RJNED" 0402 3410,4730 r0 bottom value=680
R143 "CRCW040210K0JNED" 0402 3680,4070 r270 bottom value=10k
R144 "CRCW04020000Z0ED" 0402 3485,4360 r270 bottom value=0
R145 "CRCW040210K0JNED" 0402 3691.38,3920 r180 bottom value=10k
R146 "CRCW04021K00JNED" 0402 3693.62,3840 r0 bottom value=1.0k
R147 "CRCW04021K00JNED" 0402 2750,3810 r270 bottom value=1.0k
R148 "CRCW04021K00JNED" 0402 2930,3805 r270 bottom value=1.0k
R149 "CRCW040210K0JNED" 0402 3215,3825 r90 top value=10k
R150 "CRCW04022K20JNED" 0402 3135,3945 r90 top value=2.2k
R151 "CRCW04021K00JNED" 0402 3400,4360 r270 bottom value=1.0k
R152 "CRCW04020000Z0ED" 0402 2731.38,4535 r0 bottom value=0
R153 "CRCW04020000Z0ED" 0402 2870,4140 r270 top value=0
R154 "CRCW040212K0JNED" 0402 2951.38,4365 r0 bottom value=12k
R155 "CRCW04020000Z0ED" 0402 3415,3725 r180 top value=0
R156 "CRCW040210K0JNED" 0402 11145,8585 r90 top value=10k
S1 "CAS-D20TA" SW_CAS-D20TA 4455.59,2215.32 r90 top
S2 "CAS-D20TA" SW_CAS-D20TA 4184.49,2083.15 r90 top
S3 "B3U-1100P" SW_B3U-1100P 14765,3060 r0 top
S4 "218-2LPST" SW_218-2LP 10920,3185 r90 top
S5 "218-2LPST" SW_218-2LP 12105,8710 r90 top
TP1 "5003" KSTN-5003 9070,10685 r0 top
TP2 "5003" KSTN-5003 8655,10730 r0 top
TP3 "5003" KSTN-5003 8455,10695 r0 top
TP4 "5003" KSTN-5003 8845,10670 r0 top
TP5 "TESTPOINT" TP_50MIL-25MILHOLE 18820,3035 r90 top
TP6 "TESTPOINT" TP_50MIL-25MILHOLE 15845,3035 r90 top
TP7 "TESTPOINT" TP_50MIL-25MILHOLE 12920,3035 r90 top
TP8 "TESTPOINT" TP_50MIL-25MILHOLE 12230,3035 r90 top
TP9 "TESTPOINT" TP_50MIL-25MILHOLE 11075,3035 r90 top
TP10 "TESTPOINT" TP_50MIL-25MILHOLE 8635,3035 r90 top
TP11 "TESTPOINT" TP_50MIL-25MILHOLE 8030,10360.24 r90 top
TP12 "TESTPOINT" TP_50MIL-25MILHOLE 8290,10360.24 r90 top
TP13 "TESTPOINT" TP_50MIL-25MILHOLE 7346,10825 r90 top
U1 "TMS320F28388DZWTS" ZWT0337A-IPC_B 4452.48,2648.5 r0 top
U2 "SN74LVC2G07DBVR" DBV0006A_N 13865,3080 r0 top
U3 "OPA4350EA/250" DBQ0016A_N 3929.49,2343.15 r0 top
U4 "REF5030IDGKT" DGK0008A_N 3884.49,2108.15 r0 top
U5 "CDCLVC1104PW" PW0008A_N 10485,3160 r90 top
U6 "TPS3702CX33DDCT" DDC0006A_N 15450,3110 r0 top
U7 "TPS3702CX33DDCT" DDC0006A_N 13415,3110 r0 top
U8 "TPS62420DRCR" DRC0010J 6085,2067.4 r180 bottom
U9 "DP83822IRHBR" RHB0032B 6393.94,3371.06 r90 top
U10 "DP83822IRHBR" RHB0032B 5510,3395 r180 top
U11 "DP83822IRHBR" RHB0032B 4501.06,3388.94 r180 top
U12 "CAT24C16WI-GT3" SOIC-8 4945,3510 r270 bottom
U13 "TPS73033DBVR" DBV0005A_N 3480,4510 r90 top
U14 "FT2232HL-REEL" LQFP64_N 3313.9,3983.5 r270 bottom
U15 "TPD2E001DRLR" DRL0005A 3130.87,4594.69 r180 bottom
U16 "93LC56C-I/SN" SOIC-8 3320,3995 r0 top
U17 "ISO7220CD" D0008B_N 12920,8640 r0 top
U18 "SN74LVC2G06DBVR" DBV0006A_N 6005,3834.13 r90 bottom
U19 "ISO7220CD" D0008B_N 10005,8640 r0 top
U20 "ISO7220CD" D0008B_N 9100,8640 r0 top
U21 "SN74ALVC244PWR" PW0020A_N 10915,8670 r0 top
U22 "SN74LVC2G06DBVR" DBV0006A_N 5970,4370 r270 bottom
U218 "ISO7220CD" D0008B_N 11545,8640 r0 top
Y1 "CMP-0082061-2" ECS_ECS-2520S 9165,3065 r0 top
Y2 "ECS-120-20-30B-TR" ECS_ECX-53B 2695,4290 r180 bottom

## Footprints (in the part's own frame and the unit in brackets; to place one, negate y for a bottom-side part, rotate by r counter-clockwise, add the part's x,y. Pads: shape width x height; smd on the part's side, far side on the other; paste and mask are expansions set on the pad)
0201 [mm]
  rect 0.46x0.42 smd mask+0.048: 1(-0.33,0) 2(0.33,0)
  body extent -0.31,-0.16 0.31,0.16, height 0.26
0402 [mm]
  rect 0.8x0.6 smd: 1(-0.6,0) 2(0.6,0)
  silkscreen extent -1.22,-0.52 1.22,0.52, body extent -0.55,-0.3 0.55,0.3, height 0.6
0603 [mm]
  rect 1x0.95 smd: 1(-0.8,0) 2(0.8,0)
  silkscreen extent -1.52,-0.69 1.52,0.69, body extent -0.87,-0.47 0.87,0.47, height 1
0805_HV [mil]
  rect 50x63 smd: 1(-40,0) 2(40,0)
  silkscreen extent -74,-40 74,40, body extent -43,-29 43,29, height 57
1206 [mm]
  rect 1.3x1.85 smd: 1(-1.45,0) 2(1.45,0)
  silkscreen extent -2.4,-1.21 2.4,1.21, body extent -1.7,-0.9 1.7,0.9, height 1.35
1812_180 [mm]
  rect 1.85x4.36 smd: 1(-2.53,0) 2(2.53,0)
  silkscreen extent -3.75,-2.48 3.75,2.48, body extent -2.43,-1.75 2.42,1.75, height 1.8
AMPHENOL_10144517-101802LF [mm] "Plug(male)"
  rect 0.5x2 smd: 1(19.6,2.2) 2(19.6,-2.2) 3(18.8,2.2) 4(18.8,-2.2) 5(18,2.2) 6(18,-2.2) 7(17.2,2.2) 8(17.2,-2.2) 9(16.4,2.2) 10(16.4,-2.2) 11(15.6,2.2) 12(15.6,-2.2) 13(14.8,2.2) 14(14.8,-2.2) 15(14,2.2) 16(14,-2.2) 17(13.2,2.2) 18(13.2,-2.2) 19(12.4,2.2) 20(12.4,-2.2) 21(11.6,2.2) 22(11.6,-2.2) 23(10.8,2.2) 24(10.8,-2.2) 25(10,2.2) 26(10,-2.2) 27(9.2,2.2) 28(9.2,-2.2) 29(8.4,2.2) 30(8.4,-2.2) 31(7.6,2.2) 32(7.6,-2.2) 33(6.8,2.2) 34(6.8,-2.2) 35(6,2.2) 36(6,-2.2) 37(5.2,2.2) 38(5.2,-2.2) 39(4.4,2.2) 40(4.4,-2.2) 41(3.6,2.2) 42(3.6,-2.2) 43(2.8,2.2) 44(2.8,-2.2) 45(2,2.2) 46(2,-2.2) 47(1.2,2.2) 48(1.2,-2.2) 49(0.4,2.2) 50(0.4,-2.2) 51(-0.4,2.2) 52(-0.4,-2.2) 53(-1.2,2.2) 54(-1.2,-2.2) 55(-2,2.2) 56(-2,-2.2) 57(-2.8,2.2) 58(-2.8,-2.2) 59(-3.6,2.2) 60(-3.6,-2.2) 61(-4.4,2.2) 62(-4.4,-2.2) 63(-5.2,2.2) 64(-5.2,-2.2) 65(-6,2.2) 66(-6,-2.2) 67(-6.8,2.2) 68(-6.8,-2.2) 69(-7.6,2.2) 70(-7.6,-2.2) 71(-8.4,2.2) 72(-8.4,-2.2) 73(-9.2,2.2) 74(-9.2,-2.2) 75(-10,2.2) 76(-10,-2.2) 77(-10.8,2.2) 78(-10.8,-2.2) 79(-11.6,2.2) 80(-11.6,-2.2) 81(-12.4,2.2) 82(-12.4,-2.2) 83(-13.2,2.2) 84(-13.2,-2.2) 85(-14,2.2) 86(-14,-2.2) 87(-14.8,2.2) 88(-14.8,-2.2) 89(-15.6,2.2) 90(-15.6,-2.2) 91(-16.4,2.2) 92(-16.4,-2.2) 93(-17.2,2.2) 94(-17.2,-2.2) 95(-18,2.2) 96(-18,-2.2) 97(-18.8,2.2) 98(-18.8,-2.2) 99(-19.6,2.2) 100(-19.6,-2.2)
  round 0.83 hole 0.83 unplated: ""(-22.1,0)
  round 1.23 hole 1.23 unplated: ""(22.1,0)
  silkscreen extent -22.9,-3 22.9,3.85, body extent -22.9,-3 22.9,3, height 3.65
CAPC0603(1608)100_L [mm] "Chip Capacitor, Body 1.6x0.8mm, Height 1.0mm, IPC High Density"
  rrect25% 0.66x0.76 smd: 1(-0.7,0) 2(0.7,0)
  silkscreen extent 0,-0.3 0,0.3, body extent -0.8,-0.4 0.8,0.4, height 0.95
CAPC0805(2012)145_L [mm] "Chip Capacitor, Body 2.0x1.2mm, Height 1.45mm, IPC High Density"
  rrect25% 0.76x1.3 smd: 1(-0.9,0) 2(0.89,0)
  silkscreen extent -0.3,-0.55 0.3,0.55, body extent -1,-0.6 1,0.6, height 1.45
CAPC1005X56X25LL10T15 [mm] "Chip Capacitor, 2-Leads, Body 1.10x0.60mm, IPC High Density"
  rect 0.58x0.54 smd: 1(-0.39,0) 2(0.39,0)
  body extent -0.55,-0.3 0.55,0.3, height 0.56
CFSH0520LTRPBFREE [mm]
  rect 0.55x0.6 smd: 1(-0.4,0) 2(0.4,0)
  silkscreen extent -1.2,-0.05 -1.1,0.05, body extent -0.5,-0.3 0.5,0.3, height 0.4
CPF0402 [mm]
  rect 0.5x0.6 smd: 1(-0.5,0) 2(0.5,0)
  silkscreen extent -0.97,-0.53 0.97,0.53, body extent -0.55,-0.27 0.55,0.27, height 0.35
D0008B_N [mil]
  oval 55x23.62 smd: 1(-108.5,75) 2(-108.5,25) 3(-108.5,-25) 4(-108.5,-75) 5(108.5,-75) 6(108.5,-25) 7(108.5,25) 8(108.5,75)
  silkscreen extent -130,-98 35,98, body extent -118,-96 118,96, height 64
DBQ0016A_N [mm]
  oval 1.45x0.4 smd: 1(-2.725,2.222) 2(-2.725,1.587) 3(-2.725,0.953) 4(-2.725,0.318) 5(-2.725,-0.318) 6(-2.725,-0.953) 7(-2.725,-1.587) 8(-2.725,-2.222) 9(2.725,-2.222) 10(2.725,-1.587) 11(2.725,-0.953) 12(2.725,-0.318) 13(2.725,0.318) 14(2.725,0.953) 15(2.725,1.587) 16(2.725,2.222)
  silkscreen extent -3.35,-2.5 1.1,2.68, body extent -3.01,-2.45 3.01,2.45, height 1.63
DBV0005A_N [mm]
  rrect17% 1x0.6 smd: 1(-1.375,0.95) 2(-1.375,0) 3(-1.375,-0.95) 4(1.375,-0.95) 5(1.375,0.95)
  silkscreen extent -0.25,-1.55 0.25,1.55, body extent -1.42,-1.46 1.42,1.46, height 1.09
DBV0006A_N [mm]
  rrect17% 1x0.6 smd: 1(-1.375,0.95) 2(-1.375,0) 3(-1.375,-0.95) 4(1.375,-0.95) 5(1.375,0) 6(1.375,0.95)
  silkscreen extent -1.68,-1.55 0.5,1.55, body extent -1.42,-1.46 1.42,1.46, height 1.12
DDC0006A_N [mm]
  rrect17% 1x0.6 smd: 1(-1.375,0.95) 2(-1.375,0) 3(-1.375,-0.95) 4(1.375,-0.95) 5(1.375,0) 6(1.375,0.95)
  silkscreen extent -1.75,-1.52 0.7,1.53, body extent -1.43,-1.48 1.43,1.49, height 0.92
DGK0008A_N [mm]
  oval 1.35x0.45 smd: 1(-2.225,0.975) 2(-2.225,0.325) 3(-2.225,-0.325) 4(-2.225,-0.975) 5(2.225,-0.975) 6(2.225,-0.325) 7(2.225,0.325) 8(2.225,0.975)
  silkscreen extent -2.75,-1.55 0.95,1.55, body extent -2.45,-1.5 2.45,1.5, height 0.96
DRC0010J [mm] "for TPS62420DRCR"
  oval 0.6x0.24 smd paste+0 mask+0.051: 1(-1.4,1) 2(-1.4,0.5) 3(-1.4,0) 4(-1.4,-0.5) 5(-1.4,-1) 6(1.4,-1) 7(1.4,-0.5) 8(1.4,0) 9(1.4,0.5) 10(1.4,1)
  rect 1.65x2.4 smd paste-1.187 mask+0.051: 11(0,0)
  round 0.5 / inner round 1.524 / far side round 0.5 hole 0.203 paste-2539.97 mask+0.051: V(-0.575,0) V(0,-0.95) V(0,0.95) V(0.575,0)
  Top Layer region: 0.135,1.5 0.135,1.1 0.365,1.1 0.365,1.5
  Top Layer region: 0.135,-1.1 0.135,-1.5 0.365,-1.5 0.365,-1.1
  Top Layer region: -0.135,-1.5 -0.135,-1.1 -0.365,-1.1 -0.365,-1.5
  Top Layer region: -0.135,1.1 -0.135,1.5 -0.365,1.5 -0.365,1.1
  silkscreen extent -1.7,-1.7 1.7,1.7
DRL0005A [mm]
  rrect33% 0.67x0.3 smd: 1(-0.74,0.5) 2(-0.74,0) 3(-0.74,-0.5) 4(0.74,-0.5) 5(0.74,0.5)
  silkscreen extent -0.9,-0.95 0.5,0.95, body extent -0.85,-0.85 0.85,0.85, height 0.62
ECS_ECS-2520S [mm]
  rrect12% 0.8x0.9 smd: 1(-0.725,0.925) 2(-0.725,-0.925) 3(0.725,-0.925) 4(0.725,0.925)
  silkscreen extent -1.7,0.9 -1.5,1.1, body extent -1.05,-1.3 1.05,1.3, height 1
ECS_ECX-53B [mm]
  rect 1.25x1.6 smd: 1(-1.1,1.85) 2(-1.1,-1.85) 3(1.1,-1.85) 4(1.1,1.85)
  silkscreen extent -2.05,-2.7 1.83,2.73, body extent -1.7,-2.6 1.7,2.6, height 0.86
FP-TMM-105-01-T-D_HDR10-MFG [mm]
  rrect7% 1.39x1.39 hole 0.89 paste-2539.97 mask+0: 1(-4,-1)
  round 1.39 hole 0.89 paste-2539.97 mask+0: 2(-4,1) 3(-2,-1) 4(-2,1) 5(0,-1) 6(0,1) 7(2,-1) 8(2,1) 9(4,-1) 10(4,1)
  body extent -5.1,-2.13 5.1,2.13, height 0.25
INDC2520X100X60NL20T20 [mm] "Chip Inductor, 2-Leads, Body 2.7x2.2mm, IPC Medium Density"
  rect 1.23x2.22 smd: 1(-1.085,0) 2(1.085,0)
  silkscreen extent -0.1,-1.01 0.1,1.01, body extent -1.35,-1.1 1.35,1.1, height 1
KSTN-5003 [mm] "Test Point, Through Hole, Dia 2.54mm"
  round 1.5 hole 1: 1(0,0)
  silkscreen extent -1.27,-1.27 1.27,1.27, body extent -1.27,-1.27 1.27,1.27, height 4.57
LEDC2012X70N [mm]
  rect 0.9x1.4 smd: 1(-0.95,0) 2(0.95,0)
  silkscreen extent -1.75,-1.05 0.95,1.05, body extent -1,0 1,0.7, height 0.5
LQFP64_N [mm]
  oval 1.8x0.3 smd: 1(-5.55,3.75) 2(-5.55,3.25) 3(-5.55,2.75) 4(-5.55,2.25) 5(-5.55,1.75) 6(-5.55,1.25) 7(-5.55,0.75) 8(-5.55,0.25) 9(-5.55,-0.25) 10(-5.55,-0.75) 11(-5.55,-1.25) 12(-5.55,-1.75) 13(-5.55,-2.25) 14(-5.55,-2.75) 15(-5.55,-3.25) 16(-5.55,-3.75) 33(5.55,-3.75) 34(5.55,-3.25) 35(5.55,-2.75) 36(5.55,-2.25) 37(5.55,-1.75) 38(5.55,-1.25) 39(5.55,-0.75) 40(5.55,-0.25) 41(5.55,0.25) 42(5.55,0.75) 43(5.55,1.25) 44(5.55,1.75) 45(5.55,2.25) 46(5.55,2.75) 47(5.55,3.25) 48(5.55,3.75)
  oval 0.3x1.8 smd: 17(-3.75,-5.55) 18(-3.25,-5.55) 19(-2.75,-5.55) 20(-2.25,-5.55) 21(-1.75,-5.55) 22(-1.25,-5.55) 23(-0.75,-5.55) 24(-0.25,-5.55) 25(0.25,-5.55) 26(0.75,-5.55) 27(1.25,-5.55) 28(1.75,-5.55) 29(2.25,-5.55) 30(2.75,-5.55) 31(3.25,-5.55) 32(3.75,-5.55) 49(3.75,5.55) 50(3.25,5.55) 51(2.75,5.55) 52(2.25,5.55) 53(1.75,5.55) 54(1.25,5.55) 55(0.75,5.55) 56(0.25,5.55) 57(-0.25,5.55) 58(-0.75,5.55) 59(-1.25,5.55) 60(-1.75,5.55) 61(-2.25,5.55) 62(-2.75,5.55) 63(-3.25,5.55) 64(-3.75,5.55)
  silkscreen extent -5.67,-4.25 4.25,4.57, body extent -5,-5 5,5, height 1.6
MURA-BLM18-F-H1-CHIP-2_V [mm] "Chip Ferrite Bead, 2-Leads, Body 1.6x0.8mm, Height 0.95mm, Flow"
  rect 0.95x0.7 smd: 1(-0.825,0) 2(0.825,0)
  body extent -0.87,-0.48 0.87,0.48, height 0.95
POWERMITE [mil]
  rect 105x100 smd: 1(-46,0)
  rect 30x50 smd: 2(46,0)
  silkscreen extent -124,-63 61,63, body extent -94,-40 59,40, height 45
PW0008A_N [mm]
  oval 1.4x0.45 smd: 1(-2.95,0.975) 2(-2.95,0.325) 3(-2.95,-0.325) 4(-2.95,-0.975) 5(2.95,-0.975) 6(2.95,-0.325) 7(2.95,0.325) 8(2.95,0.975)
  silkscreen extent -3.4,-1.55 1.85,1.55, body extent -3.21,-1.5 3.21,1.5, height 1.2
PW0020A_N [mm]
  oval 1.4x0.45 smd: 1(-2.95,2.925) 2(-2.95,2.275) 3(-2.95,1.625) 4(-2.95,0.975) 5(-2.95,0.325) 6(-2.95,-0.325) 7(-2.95,-0.975) 8(-2.95,-1.625) 9(-2.95,-2.275) 10(-2.95,-2.925) 11(2.95,-2.925) 12(2.95,-2.275) 13(2.95,-1.625) 14(2.95,-0.975) 15(2.95,-0.325) 16(2.95,0.325) 17(2.95,0.975) 18(2.95,1.625) 19(2.95,2.275) 20(2.95,2.925)
  Top Overlay keep-out lines w0.2: -1.85,-3.3 1.85,-3.3
  silkscreen extent -3.5,-3.3 1.85,3.4, body extent -3.21,-3.25 3.21,3.25, height 1
RESC0402(1005)_L [mm] "Chip Resistor, Body 1.0x0.5mm, IPC High Density"
  rrect25% 0.5x0.55 smd: 1(-0.45,0) 2(0.45,0)
  silkscreen extent 0,-0.2 0,0.2, body extent -0.5,-0.25 0.5,0.25, height 0.3
RESC1005X40X25ML05T05 [mm] "Chip Resistor, 2-Leads, Body 1.05x0.55mm, IPC Low Density"
  rect 0.65x0.65 smd: 1(-0.5,0) 2(0.5,0)
  body extent -0.53,-0.28 0.53,0.28, height 0.4
RESC1608X55X25ML10T15 [mm] "Chip Resistor, 2-Leads, Body 1.70x0.90mm, IPC Low Density"
  rect 0.8x1 smd: 1(-0.75,0) 2(0.75,0)
  body extent -0.85,-0.45 0.85,0.45, height 0.55
RHB0032B [mm]
  rrect40% 0.6x0.25 smd: 1(-2.4,1.75) 2(-2.4,1.25) 3(-2.4,0.75) 4(-2.4,0.25) 5(-2.4,-0.25) 6(-2.4,-0.75) 7(-2.4,-1.25) 8(-2.4,-1.75) 17(2.4,-1.75) 18(2.4,-1.25) 19(2.4,-0.75) 20(2.4,-0.25) 21(2.4,0.25) 22(2.4,0.75) 23(2.4,1.25) 24(2.4,1.75)
  rrect40% 0.25x0.6 smd: 9(-1.75,-2.4) 10(-1.25,-2.4) 11(-0.75,-2.4) 12(-0.25,-2.4) 13(0.25,-2.4) 14(0.75,-2.4) 15(1.25,-2.4) 16(1.75,-2.4) 25(1.75,2.4) 26(1.25,2.4) 27(0.75,2.4) 28(0.25,2.4) 29(-0.25,2.4) 30(-0.75,2.4) 31(-1.25,2.4) 32(-1.75,2.4)
  rrect50% 1.27x1.27 on Top Paste: 33(-0.735,-0.735) 33(-0.735,0.735) 33(0.735,-0.735) 33(0.735,0.735)
  rrect3% 2.9x2.9 smd paste-1.725: 33(0,0)
  silkscreen extent -2.72,-2.73 2.72,2.73, body extent -2.57,-2.57 2.58,2.58, height 1.01
SHDR10W66P254_2X5_2030X905X905P [mm]
  rect 1.725x1.725 hole 1.15: 1(0,0)
  round 1.725 hole 1.15: 2(0,2.54) 3(2.54,0) 4(2.54,2.54) 5(5.08,0) 6(5.08,2.54) 7(7.62,0) 8(7.62,2.54) 9(10.16,0) 10(10.16,2.54)
  silkscreen extent -5.07,-3.13 15.53,5.92, body extent -5.07,-3.25 15.23,5.79, height 9.05
SOIC-8 [mm]
  rrect17% 1.45x0.6 smd: 1(-2.725,1.905) 2(-2.725,0.635) 3(-2.725,-0.635) 4(-2.725,-1.905) 5(2.725,-1.905) 6(2.725,-0.635) 7(2.725,0.635) 8(2.725,1.905)
  silkscreen extent -3.5,-2.5 0.9,2.5, body extent -3,-2.45 3,2.45, height 1.63
SW_218-2LP [mm]
  rect 1.27x0.76 smd: 1(-3.81,0.635) 2(-3.81,-0.635) 3(3.81,-0.635) 4(3.81,0.635)
  silkscreen extent -2.9,-1.86 2.9,2.09, body extent -4.22,-1.86 4.22,1.85, height 2.62
SW_B3U-1100P [mm]
  rect 0.8x1.8 smd: 1(-1.7,0) 2(1.7,0)
  rect 0.8x1.2 smd: 3(0,1.65)
  silkscreen extent -2.82,-1.25 1.5,1.25, body extent -2,-1.25 2,1.9, height 1.6
SW_CAS-D20TA [mm]
  rect 1.6x1 smd: 1(-1.85,1.75) 2(-1.85,0) 3(-1.85,-1.75) 4(1.85,1.75) 5(1.85,0) 6(1.85,-1.75)
  silkscreen extent -1.95,-2.7 1.95,2.9, body extent -2.1,-2.7 2.1,2.7, height 2.5
TP_50MIL-25MILHOLE [mil]
  round 50 hole 25: 1(0,0)
WL-SMCW_Blue_0805 [mm]
  rect 1.1x1.2 smd: 1(-1.05,0) 2(1.05,0)
  silkscreen extent -2.4,-1.1 1.5,1.1, body extent -1,-0.62 1,0.63, height 0.7
WL-SMCW_Green_0805 [mm]
  rect 1.1x1.2 smd: 1(-1.05,0) 2(1.05,0)
  silkscreen extent -2.4,-1.1 1.5,1.1, body extent -1,-0.62 1,0.63, height 0.7
WL-SMCW_RED_0805 [mm]
  rect 1.1x1.2 smd: 1(-1.05,0) 2(1.05,0)
  silkscreen extent -2.4,-1.1 1.5,1.1, body extent -1,-0.62 1,0.63, height 0.7
Wurth_7498010210A [mm]
  rrect12% 4.6x0.81 smd: 1(-20.69,6.61) 2(-20.69,4.77) 11(-20.69,-4.77) 12(-20.69,-6.61)
  rrect16% 4.6x0.61 smd: 3(-20.69,3.57) 4(-20.69,2.55) 5(-20.69,1.53) 6(-20.69,0.51) 7(-20.69,-0.51) 8(-20.69,-1.53) 9(-20.69,-2.55) 10(-20.69,-3.57)
  rrect3% 4.9x3 smd: 13(0,8.92) 14(0,-8.92)
  round 2.5 hole 2.8 unplated mask+0.102: ALIGN1(0,6.35) ALIGN2(0,-6.35)
  body extent -21.42,-9.65 5.43,9.65, height 15.22
Wurth_65100516121 [mm]
  rect 0.5x2.5 smd: 1(-1.6,8.5) 2(-0.8,8.5) 3(0,8.5) 4(0.8,8.5) 5(1.6,8.5)
  rect 2x2.5 smd: 6(-4.4,8.5) 7(4.4,8.5) 8(-4.4,3) 9(4.4,3)
  round 0.9 hole 0.9 unplated mask+0: ALIGN1(-2.2,5.9) ALIGN2(2.2,5.9)
  silkscreen extent -3.85,0.15 3.85,9.6, body extent -4.8,0 4.8,9.25, height 3.91
ZWT0337A-IPC_B [mm] "for F28388DZWTS"
  round 0.4 smd paste+0 mask+0: A1(-7.2,7.2) A2(-6.4,7.2) A3(-5.6,7.2) A4(-4.8,7.2) A5(-4,7.2) A6(-3.2,7.2) A7(-2.4,7.2) A8(-1.6,7.2) A9(-0.8,7.2) A10(0,7.2) A11(0.8,7.2) A12(1.6,7.2) A13(2.4,7.2) A14(3.2,7.2) A15(4,7.2) A16(4.8,7.2) A17(5.6,7.2) A18(6.4,7.2) A19(7.2,7.2) B1(-7.2,6.4) B2(-6.4,6.4) B3(-5.6,6.4) B4(-4.8,6.4) B5(-4,6.4) B6(-3.2,6.4) B7(-2.4,6.4) B8(-1.6,6.4) B9(-0.8,6.4) B10(0,6.4) B11(0.8,6.4) B12(1.6,6.4) B13(2.4,6.4) B14(3.2,6.4) B15(4,6.4) B16(4.8,6.4) B17(5.6,6.4) B18(6.4,6.4) B19(7.2,6.4) C1(-7.2,5.6) C2(-6.4,5.6) C3(-5.6,5.6) C4(-4.8,5.6) C5(-4,5.6) C6(-3.2,5.6) C7(-2.4,5.6) C8(-1.6,5.6) C9(-0.8,5.6) C10(0,5.6) C11(0.8,5.6) C12(1.6,5.6) C13(2.4,5.6) C14(3.2,5.6) C15(4,5.6) C16(4.8,5.6) C17(5.6,5.6) C18(6.4,5.6) C19(7.2,5.6) D1(-7.2,4.8) D2(-6.4,4.8) D3(-5.6,4.8) D4(-4.8,4.8) D5(-4,4.8) D6(-3.2,4.8) D7(-2.4,4.8) D8(-1.6,4.8) D9(-0.8,4.8) D10(0,4.8) D11(0.8,4.8) D12(1.6,4.8) D13(2.4,4.8) D14(3.2,4.8) D15(4,4.8) D16(4.8,4.8) D17(5.6,4.8) D18(6.4,4.8) D19(7.2,4.8) E1(-7.2,4) E2(-6.4,4) E3(-5.6,4) E4(-4.8,4) E5(-4,4) E6(-3.2,4) E7(-2.4,4) E8(-1.6,4) E9(-0.8,4) E10(0,4) E11(0.8,4) E12(1.6,4) E13(2.4,4) E14(3.2,4) E15(4,4) E16(4.8,4) E17(5.6,4) E18(6.4,4) E19(7.2,4) F1(-7.2,3.2) F2(-6.4,3.2) F3(-5.6,3.2) F4(-4.8,3.2) F5(-4,3.2) F6(-3.2,3.2) F7(-2.4,3.2) F8(-1.6,3.2) F9(-0.8,3.2) F10(0,3.2) F11(0.8,3.2) F12(1.6,3.2) F13(2.4,3.2) F14(3.2,3.2) F15(4,3.2) F16(4.8,3.2) F17(5.6,3.2) F18(6.4,3.2) F19(7.2,3.2) G1(-7.2,2.4) G2(-6.4,2.4) G3(-5.6,2.4) G4(-4.8,2.4) G5(-4,2.4) G6(-3.2,2.4) G14(3.2,2.4) G15(4,2.4) G16(4.8,2.4) G17(5.6,2.4) G18(6.4,2.4) G19(7.2,2.4) H1(-7.2,1.6) H2(-6.4,1.6) H3(-5.6,1.6) H4(-4.8,1.6) H5(-4,1.6) H6(-3.2,1.6) H8(-1.6,1.6) H9(-0.8,1.6) H10(0,1.6) H11(0.8,1.6) H12(1.6,1.6) H14(3.2,1.6) H15(4,1.6) H16(4.8,1.6) H17(5.6,1.6) H18(6.4,1.6) H19(7.2,1.6) J1(-7.2,0.8) J2(-6.4,0.8) J3(-5.6,0.8) J4(-4.8,0.8) J5(-4,0.8) J6(-3.2,0.8) J8(-1.6,0.8) J9(-0.8,0.8) J10(0,0.8) J11(0.8,0.8) J12(1.6,0.8) J14(3.2,0.8) J15(4,0.8) J16(4.8,0.8) J17(5.6,0.8) J18(6.4,0.8) J19(7.2,0.8) K1(-7.2,0) K2(-6.4,0) K3(-5.6,0) K4(-4.8,0) K5(-4,0) K6(-3.2,0) K8(-1.6,0) K9(-0.8,0) K10(0,0) K11(0.8,0) K12(1.6,0) K14(3.2,0) K15(4,0) K16(4.8,0) K17(5.6,0) K18(6.4,0) K19(7.2,0) L1(-7.2,-0.8) L2(-6.4,-0.8) L3(-5.6,-0.8) L4(-4.8,-0.8) L5(-4,-0.8) L6(-3.2,-0.8) L8(-1.6,-0.8) L9(-0.8,-0.8) L10(0,-0.8) L11(0.8,-0.8) L12(1.6,-0.8) L14(3.2,-0.8) L15(4,-0.8) L16(4.8,-0.8) L17(5.6,-0.8) L18(6.4,-0.8) L19(7.2,-0.8) M1(-7.2,-1.6) M2(-6.4,-1.6) M3(-5.6,-1.6) M4(-4.8,-1.6) M5(-4,-1.6) M6(-3.2,-1.6) M8(-1.6,-1.6) M9(-0.8,-1.6) M10(0,-1.6) M11(0.8,-1.6) M12(1.6,-1.6) M14(3.2,-1.6) M15(4,-1.6) M16(4.8,-1.6) M17(5.6,-1.6) M18(6.4,-1.6) M19(7.2,-1.6) N1(-7.2,-2.4) N2(-6.4,-2.4) N3(-5.6,-2.4) N4(-4.8,-2.4) N5(-4,-2.4) N6(-3.2,-2.4) N14(3.2,-2.4) N15(4,-2.4) N16(4.8,-2.4) N17(5.6,-2.4) N18(6.4,-2.4) N19(7.2,-2.4) P1(-7.2,-3.2) P2(-6.4,-3.2) P3(-5.6,-3.2) P4(-4.8,-3.2) P5(-4,-3.2) P6(-3.2,-3.2) P7(-2.4,-3.2) P8(-1.6,-3.2) P9(-0.8,-3.2) P10(0,-3.2) P11(0.8,-3.2) P12(1.6,-3.2) P13(2.4,-3.2) P14(3.2,-3.2) P15(4,-3.2) P16(4.8,-3.2) P17(5.6,-3.2) P18(6.4,-3.2) P19(7.2,-3.2) R1(-7.2,-4) R2(-6.4,-4) R3(-5.6,-4) R4(-4.8,-4) R5(-4,-4) R6(-3.2,-4) R7(-2.4,-4) R8(-1.6,-4) R9(-0.8,-4) R10(0,-4) R11(0.8,-4) R12(1.6,-4) R13(2.4,-4) R14(3.2,-4) R15(4,-4) R16(4.8,-4) R17(5.6,-4) R18(6.4,-4) R19(7.2,-4) T1(-7.2,-4.8) T2(-6.4,-4.8) T3(-5.6,-4.8) T4(-4.8,-4.8) T5(-4,-4.8) T6(-3.2,-4.8) T7(-2.4,-4.8) T8(-1.6,-4.8) T9(-0.8,-4.8) T10(0,-4.8) T11(0.8,-4.8) T12(1.6,-4.8) T13(2.4,-4.8) T14(3.2,-4.8) T15(4,-4.8) T16(4.8,-4.8) T17(5.6,-4.8) T18(6.4,-4.8) T19(7.2,-4.8) U1(-7.2,-5.6) U2(-6.4,-5.6) U3(-5.6,-5.6) U4(-4.8,-5.6) U5(-4,-5.6) U6(-3.2,-5.6) U7(-2.4,-5.6) U8(-1.6,-5.6) U9(-0.8,-5.6) U10(0,-5.6) U11(0.8,-5.6) U12(1.6,-5.6) U13(2.4,-5.6) U14(3.2,-5.6) U15(4,-5.6) U16(4.8,-5.6) U17(5.6,-5.6) U18(6.4,-5.6) U19(7.2,-5.6) V1(-7.2,-6.4) V2(-6.4,-6.4) V3(-5.6,-6.4) V4(-4.8,-6.4) V5(-4,-6.4) V6(-3.2,-6.4) V7(-2.4,-6.4) V8(-1.6,-6.4) V9(-0.8,-6.4) V10(0,-6.4) V11(0.8,-6.4) V12(1.6,-6.4) V13(2.4,-6.4) V14(3.2,-6.4) V15(4,-6.4) V16(4.8,-6.4) V17(5.6,-6.4) V18(6.4,-6.4) V19(7.2,-6.4) W1(-7.2,-7.2) W2(-6.4,-7.2) W3(-5.6,-7.2) W4(-4.8,-7.2) W5(-4,-7.2) W6(-3.2,-7.2) W7(-2.4,-7.2) W8(-1.6,-7.2) W9(-0.8,-7.2) W10(0,-7.2) W11(0.8,-7.2) W12(1.6,-7.2) W13(2.4,-7.2) W14(3.2,-7.2) W15(4,-7.2) W16(4.8,-7.2) W17(5.6,-7.2) W18(6.4,-7.2) W19(7.2,-7.2)
  silkscreen extent -8.62,-8 8,8